# EAGLE board eeArm_Breakout_Panel (EAGLE 7.2.0)
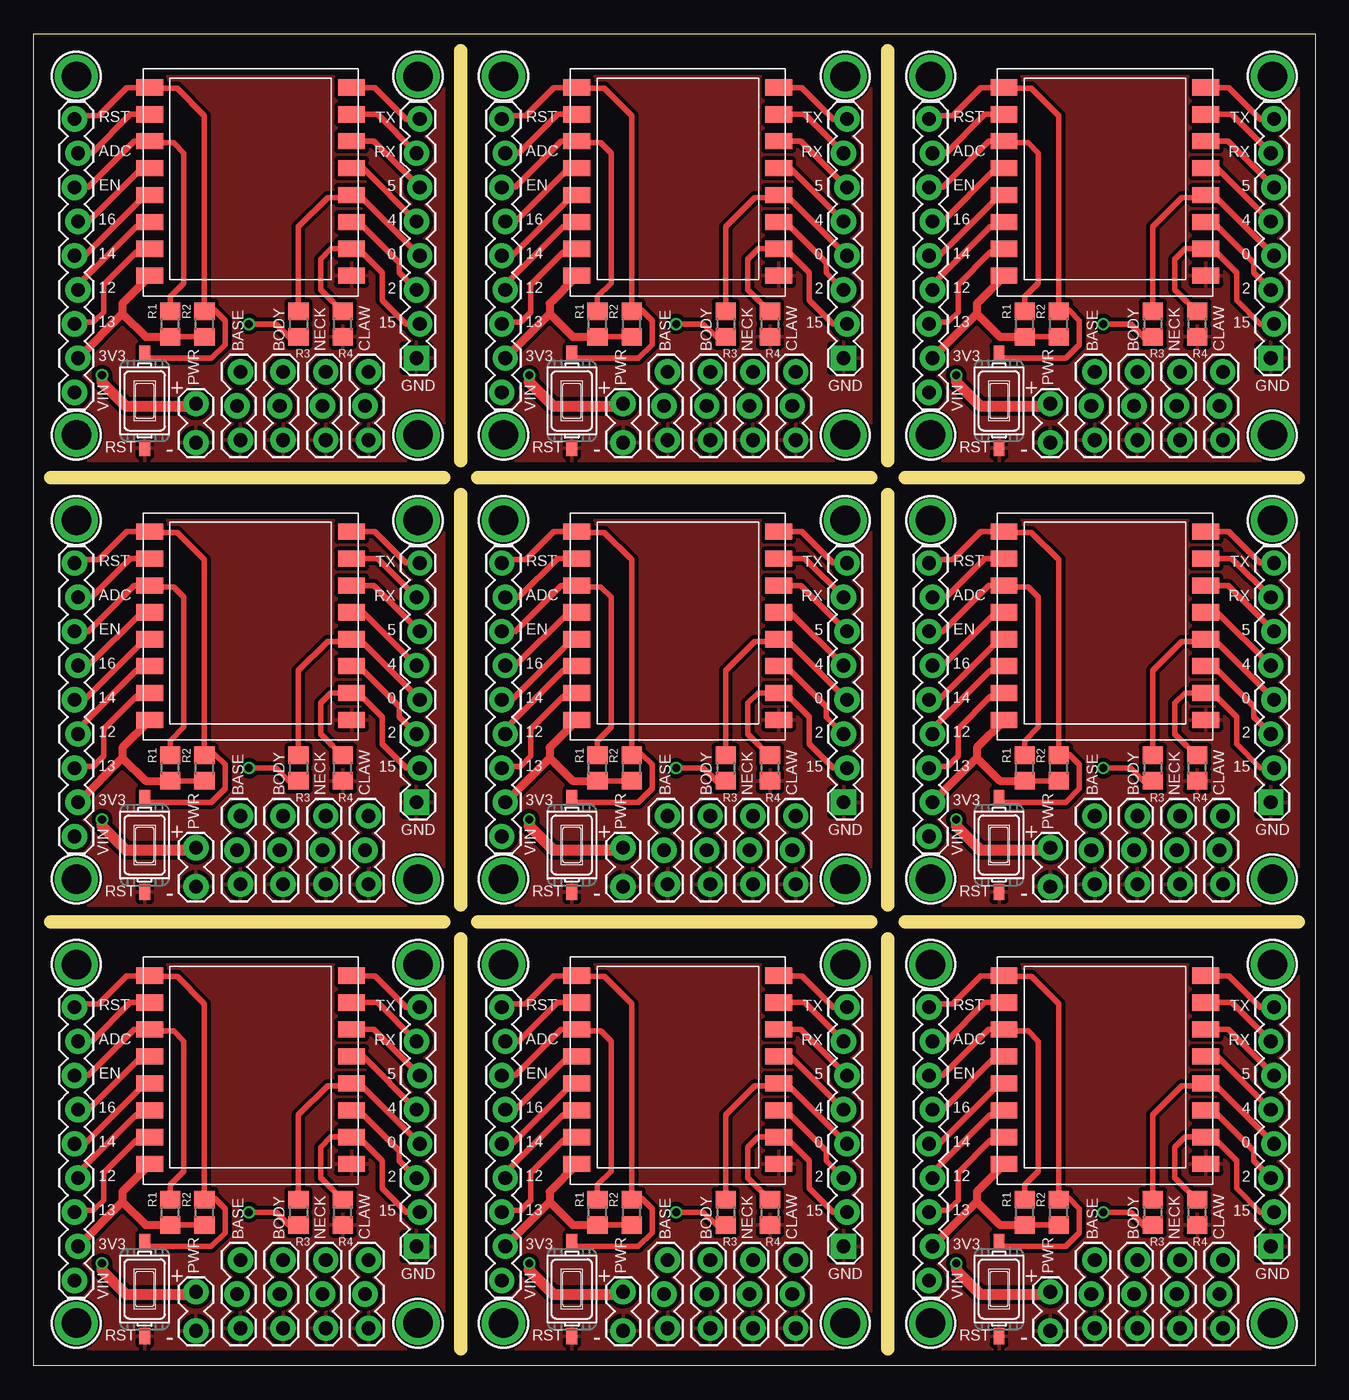
[diagram p0: board, top side]
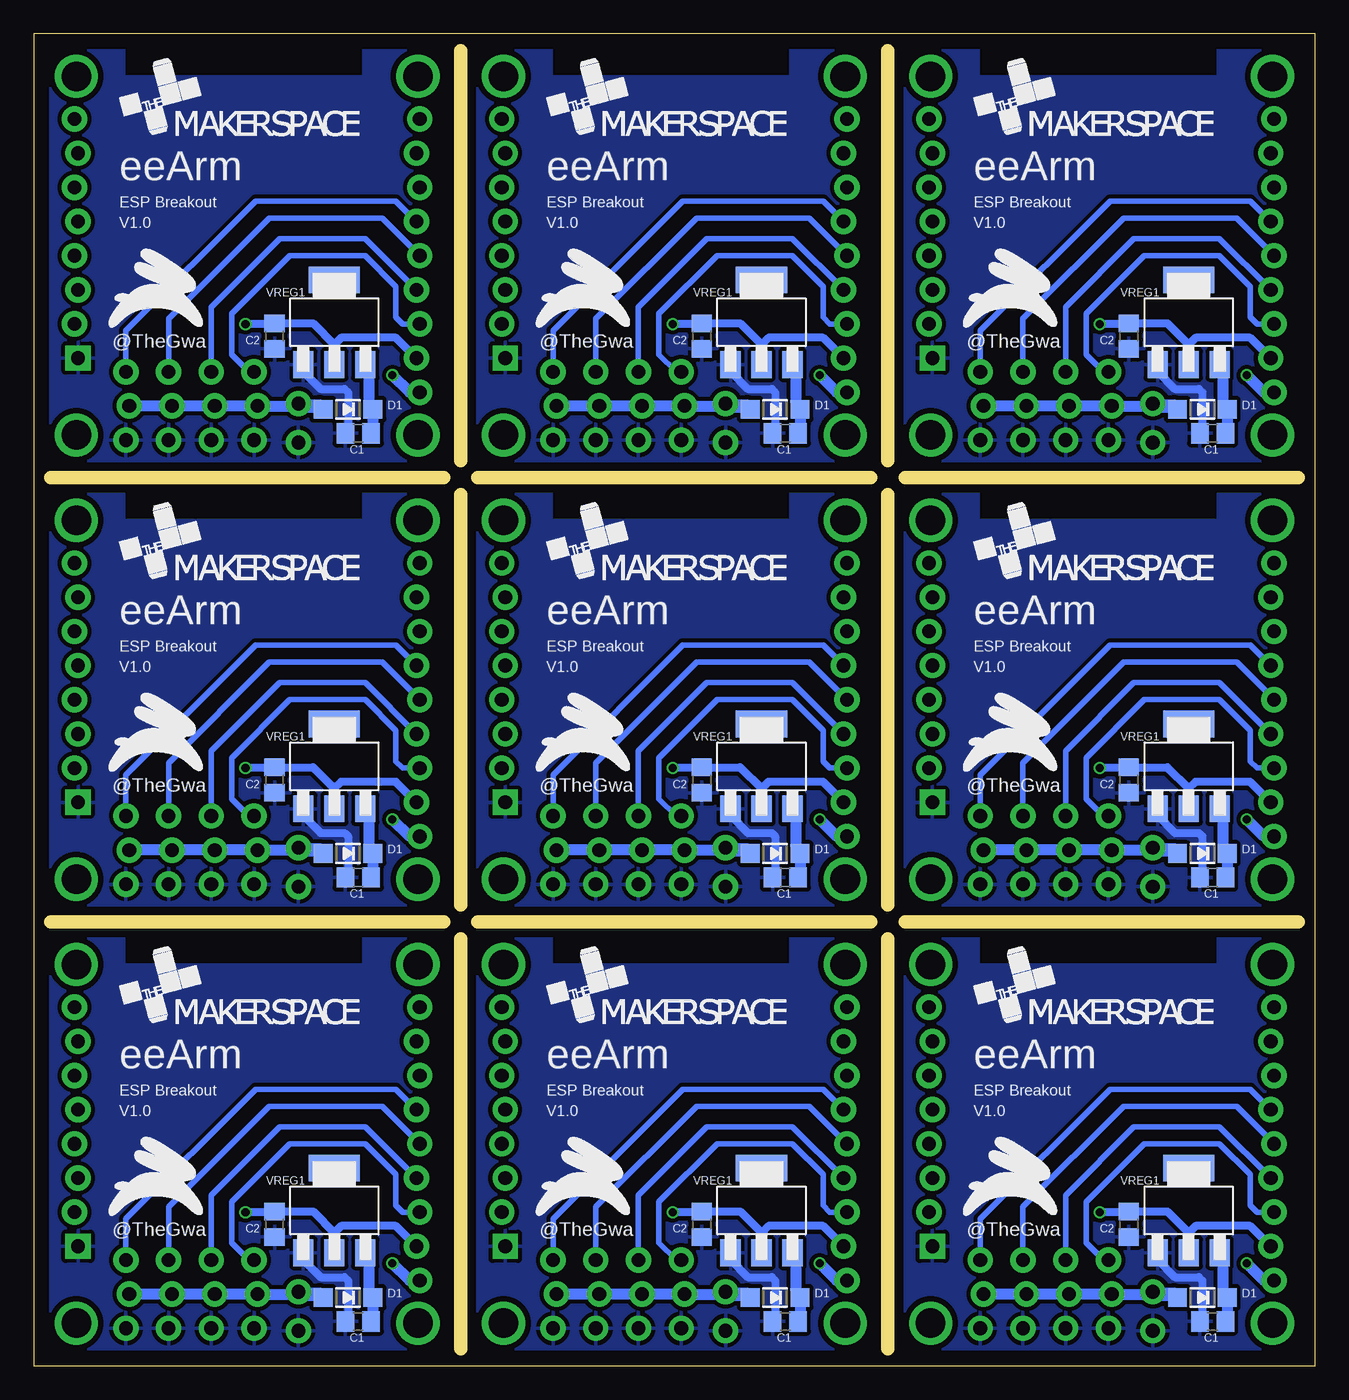
[diagram p1: board, bottom side, seen from below]

Size 95.25 x 99.06 mm. Coordinates in mm from the lower left corner, seen from the top.
Outline: 0,0 0,99.06 95.25,99.06 95.25,0 0,0
Copper layers (1*16): Top 0.035mm / dielectric 1.5mm / Bottom 0.035mm
Design rules "dirt_cheap_dirty_boards.v1 *": minimum track width 5mil, minimum drill 12mil, track to track 12mil, track to pad 12mil, pad to pad 12mil, via to via 12mil, smd to smd 0mil, copper to edge 10mil, drill to drill 10mil, minimum pad ring 10mil, minimum via ring 6mil, stop-mask expansion 2mil, vias tented up to drill 25mil, thermal gap 12mil
tRestrict: area 7.4,30 to 24.9,31.8; area 39.1,30 to 56.6,31.8; area 70.9,30 to 88.4,31.8; area 7.4,63 to 24.9,64.8; area 39.1,63 to 56.6,64.8; area 70.9,63 to 88.4,64.8; area 7.4,96 to 24.9,97.8; area 39.1,96 to 56.6,97.8; area 70.9,96 to 88.4,97.8
bRestrict: area 7.4,30 to 24.9,31.8; area 39.1,30 to 56.6,31.8; area 70.9,30 to 88.4,31.8; area 7.4,63 to 24.9,64.8; area 39.1,63 to 56.6,64.8; area 70.9,63 to 88.4,64.8; area 7.4,96 to 24.9,97.8; area 39.1,96 to 56.6,97.8; area 70.9,96 to 88.4,97.8
Milling: 12 lines

## Footprints (pad centres in the part's own frame; a part is rotated, then mirrored left to right if it is on the bottom)
1X03_LOCK = drill 1.016 pad 1.88: 1 0,0.127; 2 2.54,-0.127; 3 5.08,0.127
C0805 = smd 1.3 x 1.5: 1 -0.95,0; 2 0.95,0
SOD-123 = smd 1.4 x 1.4: A 1.85,0; C -1.85,0
1X08_LOCK = drill 1.016 pad 1.88 square: 1 0,0.127 | drill 1.016 pad 1.88: 2 2.54,-0.127; 3 5.08,0.127; 4 7.62,-0.127; 5 10.16,0.127; 6 12.7,-0.127; 7 15.24,0.127; 8 17.78,-0.127
1X09_LOCK = drill 1.016 pad 1.88: 1 0,0.127; 2 2.54,-0.127; 3 5.08,0.127; 4 7.62,-0.127; 5 10.16,0.127; 6 12.7,-0.127; 7 15.24,0.127; 8 17.78,-0.127; 9 20.32,0.127
1X02_LOCK = drill 1.016 pad 1.88: 1 -0.178,0; 2 2.718,0
R0805 = smd 1.3 x 1.5: 1 -0.95,0; 2 0.95,0
SW_TACT_3X6 = smd 1.2 x 0.8: 1 -3.5,0; 2 3.5,0
MOUNTINGHOLE_2.0_PLATED = drill 2.2 pad 3: P$1 0,0
SOT-223 = smd 1.5 x 2: 1 -2.3,-3.15; 2 0,-3.15; 3 2.3,-3.15 | smd 3.8 x 2: 4 0,3.15
ESP-12-NOPLACE = smd 2 x 1.2: 1 -7.5,4.5; 2 -7.5,2.5; 3 -7.5,0.5; 4 -7.5,-1.5; 5 -7.5,-3.5; 6 -7.5,-5.5; 7 -7.5,-7.5; 8 -7.5,-9.5; 9 7.5,-9.5; 10 7.5,-7.5; 11 7.5,-5.5; 12 7.5,-3.5; 13 7.5,-1.5; 14 7.5,0.5; 15 7.5,2.5; 16 7.5,4.5

## Placement (x,y rotation side)
BASE  [1X03_LOCK]  15.24,7.87 270 top
BASE1  [1X03_LOCK]  46.99,7.87 270 top
BASE2  [1X03_LOCK]  78.74,7.87 270 top
BASE3  [1X03_LOCK]  15.24,40.89 270 top
BASE4  [1X03_LOCK]  46.99,40.89 270 top
BASE5  [1X03_LOCK]  78.74,40.89 270 top
BASE6  [1X03_LOCK]  15.24,73.91 270 top
BASE7  [1X03_LOCK]  46.99,73.91 270 top
BASE8  [1X03_LOCK]  78.74,73.91 270 top
BODY  [1X03_LOCK]  18.42,7.87 270 top
BODY1  [1X03_LOCK]  50.16,7.87 270 top
BODY2  [1X03_LOCK]  81.92,7.87 270 top
BODY3  [1X03_LOCK]  18.42,40.89 270 top
BODY4  [1X03_LOCK]  50.16,40.89 270 top
BODY5  [1X03_LOCK]  81.92,40.89 270 top
BODY6  [1X03_LOCK]  18.42,73.91 270 top
BODY7  [1X03_LOCK]  50.16,73.91 270 top
BODY8  [1X03_LOCK]  81.92,73.91 270 top
C1  100n  [C0805]  7.62,3.3 180 bottom
C2  10u  [C0805]  13.84,10.54 270 bottom
C3  100n  [C0805]  39.37,3.3 180 bottom
C4  10u  [C0805]  45.59,10.54 270 bottom
C5  100n  [C0805]  71.12,3.3 180 bottom
C6  10u  [C0805]  77.34,10.54 270 bottom
C7  100n  [C0805]  7.62,36.32 180 bottom
C8  10u  [C0805]  13.84,43.56 270 bottom
C9  100n  [C0805]  39.37,36.32 180 bottom
C10  10u  [C0805]  45.59,43.56 270 bottom
C11  100n  [C0805]  71.12,36.32 180 bottom
C12  10u  [C0805]  77.34,43.56 270 bottom
C13  100n  [C0805]  7.62,69.34 180 bottom
C14  10u  [C0805]  13.84,76.58 270 bottom
C15  100n  [C0805]  39.37,69.34 180 bottom
C16  10u  [C0805]  45.59,76.58 270 bottom
C17  100n  [C0805]  71.12,69.34 180 bottom
C18  10u  [C0805]  77.34,76.58 270 bottom
CLAW  [1X03_LOCK]  24.77,7.87 270 top
CLAW1  [1X03_LOCK]  56.52,7.87 270 top
CLAW2  [1X03_LOCK]  88.27,7.87 270 top
CLAW3  [1X03_LOCK]  24.77,40.89 270 top
CLAW4  [1X03_LOCK]  56.52,40.89 270 top
CLAW5  [1X03_LOCK]  88.27,40.89 270 top
CLAW6  [1X03_LOCK]  24.77,73.91 270 top
CLAW7  [1X03_LOCK]  56.52,73.91 270 top
CLAW8  [1X03_LOCK]  88.27,73.91 270 top
D1  MBR120  [SOD-123]  8.38,5.08 180 bottom
D2  MBR120  [SOD-123]  40.13,5.08 180 bottom
D3  MBR120  [SOD-123]  71.88,5.08 180 bottom
D4  MBR120  [SOD-123]  8.38,38.1 180 bottom
D5  MBR120  [SOD-123]  40.13,38.1 180 bottom
D6  MBR120  [SOD-123]  71.88,38.1 180 bottom
D7  MBR120  [SOD-123]  8.38,71.12 180 bottom
D8  MBR120  [SOD-123]  40.13,71.12 180 bottom
D9  MBR120  [SOD-123]  71.88,71.12 180 bottom
E$1  [MAKERSPACE_LOGO]  25.4,25.4 0 bottom
E$2  [GWAJA-LOGO-PLACE]  26.16,11.18 0 bottom
E$3  [MAKERSPACE_LOGO]  57.15,25.4 0 bottom
E$4  [GWAJA-LOGO-PLACE]  57.91,11.18 0 bottom
E$5  [MAKERSPACE_LOGO]  88.9,25.4 0 bottom
E$6  [GWAJA-LOGO-PLACE]  89.66,11.18 0 bottom
E$7  [MAKERSPACE_LOGO]  25.4,58.42 0 bottom
E$8  [GWAJA-LOGO-PLACE]  26.16,44.2 0 bottom
E$9  [MAKERSPACE_LOGO]  57.15,58.42 0 bottom
E$10  [GWAJA-LOGO-PLACE]  57.91,44.2 0 bottom
E$11  [MAKERSPACE_LOGO]  88.9,58.42 0 bottom
E$12  [GWAJA-LOGO-PLACE]  89.66,44.2 0 bottom
E$13  [MAKERSPACE_LOGO]  25.4,91.44 0 bottom
E$14  [GWAJA-LOGO-PLACE]  26.16,77.22 0 bottom
E$15  [MAKERSPACE_LOGO]  57.15,91.44 0 bottom
E$16  [GWAJA-LOGO-PLACE]  57.91,77.22 0 bottom
E$17  [MAKERSPACE_LOGO]  88.9,91.44 0 bottom
E$18  [GWAJA-LOGO-PLACE]  89.66,77.22 0 bottom
JP1  J1  [1X08_LOCK]  60.32,8.89 90 top
JP2  J1  [1X08_LOCK]  28.58,8.89 90 top
JP3  [1X09_LOCK]  3.17,6.35 90 top
JP4  [1X09_LOCK]  34.92,6.35 90 top
JP5  J1  [1X08_LOCK]  92.08,8.89 90 top
JP6  [1X09_LOCK]  66.68,6.35 90 top
JP7  J1  [1X08_LOCK]  28.58,41.91 90 top
JP8  [1X09_LOCK]  3.17,39.37 90 top
JP9  J1  [1X08_LOCK]  60.32,41.91 90 top
JP10  [1X09_LOCK]  34.92,39.37 90 top
JP11  J1  [1X08_LOCK]  92.08,41.91 90 top
JP12  [1X09_LOCK]  66.68,39.37 90 top
JP13  J1  [1X08_LOCK]  28.58,74.93 90 top
JP14  [1X09_LOCK]  3.17,72.39 90 top
JP15  J1  [1X08_LOCK]  60.32,74.93 90 top
JP16  [1X09_LOCK]  34.92,72.39 90 top
JP17  J1  [1X08_LOCK]  92.08,74.93 90 top
JP18  [1X09_LOCK]  66.68,72.39 90 top
NECK  [1X03_LOCK]  21.59,7.87 270 top
NECK1  [1X03_LOCK]  53.34,7.87 270 top
NECK2  [1X03_LOCK]  85.09,7.87 270 top
NECK3  [1X03_LOCK]  21.59,40.89 270 top
NECK4  [1X03_LOCK]  53.34,40.89 270 top
NECK5  [1X03_LOCK]  85.09,40.89 270 top
NECK6  [1X03_LOCK]  21.59,73.91 270 top
NECK7  [1X03_LOCK]  53.34,73.91 270 top
NECK8  [1X03_LOCK]  85.09,73.91 270 top
POWER  [1X02_LOCK]  12.06,5.33 270 top
POWER1  [1X02_LOCK]  43.81,5.33 270 top
POWER2  [1X02_LOCK]  75.57,5.33 270 top
POWER3  [1X02_LOCK]  12.06,38.35 270 top
POWER4  [1X02_LOCK]  43.81,38.35 270 top
POWER5  [1X02_LOCK]  75.57,38.35 270 top
POWER6  [1X02_LOCK]  12.06,71.37 270 top
POWER7  [1X02_LOCK]  43.81,71.37 270 top
POWER8  [1X02_LOCK]  75.57,71.37 270 top
R1  4K7  [R0805]  10.16,11.43 90 top
R2  4K7  [R0805]  12.7,11.43 90 top
R3  4K7  [R0805]  19.69,11.43 270 top
R4  4K7  [R0805]  22.99,11.43 90 top
R5  4K7  [R0805]  54.74,11.43 90 top
R6  4K7  [R0805]  41.91,11.43 90 top
R7  4K7  [R0805]  44.45,11.43 90 top
R8  4K7  [R0805]  51.43,11.43 270 top
R9  4K7  [R0805]  86.49,11.43 90 top
R10  4K7  [R0805]  73.66,11.43 90 top
R11  4K7  [R0805]  76.2,11.43 90 top
R12  4K7  [R0805]  83.19,11.43 270 top
R13  4K7  [R0805]  22.99,44.45 90 top
R14  4K7  [R0805]  10.16,44.45 90 top
R15  4K7  [R0805]  12.7,44.45 90 top
R16  4K7  [R0805]  19.69,44.45 270 top
R17  4K7  [R0805]  54.74,44.45 90 top
R18  4K7  [R0805]  41.91,44.45 90 top
R19  4K7  [R0805]  44.45,44.45 90 top
R20  4K7  [R0805]  51.43,44.45 270 top
R21  4K7  [R0805]  86.49,44.45 90 top
R22  4K7  [R0805]  73.66,44.45 90 top
R23  4K7  [R0805]  76.2,44.45 90 top
R24  4K7  [R0805]  83.19,44.45 270 top
R25  4K7  [R0805]  22.99,77.47 90 top
R26  4K7  [R0805]  10.16,77.47 90 top
R27  4K7  [R0805]  12.7,77.47 90 top
R28  4K7  [R0805]  19.69,77.47 270 top
R29  4K7  [R0805]  54.74,77.47 90 top
R30  4K7  [R0805]  41.91,77.47 90 top
R31  4K7  [R0805]  44.45,77.47 90 top
R32  4K7  [R0805]  51.43,77.47 270 top
R33  4K7  [R0805]  86.49,77.47 90 top
R34  4K7  [R0805]  73.66,77.47 90 top
R35  4K7  [R0805]  76.2,77.47 90 top
R36  4K7  [R0805]  83.19,77.47 270 top
RESET  SW_TACT_2P-3X6  [SW_TACT_3X6]  8.26,5.71 90 top
RESET1  SW_TACT_2P-3X6  [SW_TACT_3X6]  40,5.71 90 top
RESET2  SW_TACT_2P-3X6  [SW_TACT_3X6]  71.76,5.71 90 top
RESET3  SW_TACT_2P-3X6  [SW_TACT_3X6]  8.26,38.73 90 top
RESET4  SW_TACT_2P-3X6  [SW_TACT_3X6]  40,38.73 90 top
RESET5  SW_TACT_2P-3X6  [SW_TACT_3X6]  71.76,38.73 90 top
RESET6  SW_TACT_2P-3X6  [SW_TACT_3X6]  8.26,71.76 90 top
RESET7  SW_TACT_2P-3X6  [SW_TACT_3X6]  40,71.76 90 top
RESET8  SW_TACT_2P-3X6  [SW_TACT_3X6]  71.76,71.76 90 top
U$1  MOUNTINGHOLE2.0  [MOUNTINGHOLE_2.0_PLATED]  60.32,29.85 0 top
U$2  MOUNTINGHOLE2.0  [MOUNTINGHOLE_2.0_PLATED]  34.92,29.85 0 top
U$3  MOUNTINGHOLE2.0  [MOUNTINGHOLE_2.0_PLATED]  34.92,3.17 0 top
U$4  MOUNTINGHOLE2.0  [MOUNTINGHOLE_2.0_PLATED]  60.32,3.17 0 top
U$5  MOUNTINGHOLE2.0  [MOUNTINGHOLE_2.0_PLATED]  92.08,29.85 0 top
U$6  MOUNTINGHOLE2.0  [MOUNTINGHOLE_2.0_PLATED]  28.58,29.85 0 top
U$7  MOUNTINGHOLE2.0  [MOUNTINGHOLE_2.0_PLATED]  3.17,29.85 0 top
U$8  MOUNTINGHOLE2.0  [MOUNTINGHOLE_2.0_PLATED]  3.17,3.17 0 top
U$9  MOUNTINGHOLE2.0  [MOUNTINGHOLE_2.0_PLATED]  28.58,3.17 0 top
U$10  MOUNTINGHOLE2.0  [MOUNTINGHOLE_2.0_PLATED]  66.68,29.85 0 top
U$11  MOUNTINGHOLE2.0  [MOUNTINGHOLE_2.0_PLATED]  66.68,3.17 0 top
U$12  MOUNTINGHOLE2.0  [MOUNTINGHOLE_2.0_PLATED]  92.08,3.17 0 top
U$13  MOUNTINGHOLE2.0  [MOUNTINGHOLE_2.0_PLATED]  28.58,62.86 0 top
U$14  MOUNTINGHOLE2.0  [MOUNTINGHOLE_2.0_PLATED]  3.17,62.86 0 top
U$15  MOUNTINGHOLE2.0  [MOUNTINGHOLE_2.0_PLATED]  3.17,36.2 0 top
U$16  MOUNTINGHOLE2.0  [MOUNTINGHOLE_2.0_PLATED]  28.58,36.2 0 top
U$17  MOUNTINGHOLE2.0  [MOUNTINGHOLE_2.0_PLATED]  60.32,62.86 0 top
U$18  MOUNTINGHOLE2.0  [MOUNTINGHOLE_2.0_PLATED]  34.92,62.86 0 top
U$19  MOUNTINGHOLE2.0  [MOUNTINGHOLE_2.0_PLATED]  34.92,36.2 0 top
U$20  MOUNTINGHOLE2.0  [MOUNTINGHOLE_2.0_PLATED]  60.32,36.2 0 top
U$21  MOUNTINGHOLE2.0  [MOUNTINGHOLE_2.0_PLATED]  92.08,62.86 0 top
U$22  MOUNTINGHOLE2.0  [MOUNTINGHOLE_2.0_PLATED]  66.68,62.86 0 top
U$23  MOUNTINGHOLE2.0  [MOUNTINGHOLE_2.0_PLATED]  66.68,36.2 0 top
U$24  MOUNTINGHOLE2.0  [MOUNTINGHOLE_2.0_PLATED]  92.08,36.2 0 top
U$25  MOUNTINGHOLE2.0  [MOUNTINGHOLE_2.0_PLATED]  28.58,95.89 0 top
U$26  MOUNTINGHOLE2.0  [MOUNTINGHOLE_2.0_PLATED]  3.17,95.89 0 top
U$27  MOUNTINGHOLE2.0  [MOUNTINGHOLE_2.0_PLATED]  3.17,69.22 0 top
U$28  MOUNTINGHOLE2.0  [MOUNTINGHOLE_2.0_PLATED]  28.58,69.22 0 top
U$29  MOUNTINGHOLE2.0  [MOUNTINGHOLE_2.0_PLATED]  60.32,95.89 0 top
U$30  MOUNTINGHOLE2.0  [MOUNTINGHOLE_2.0_PLATED]  34.92,95.89 0 top
U$31  MOUNTINGHOLE2.0  [MOUNTINGHOLE_2.0_PLATED]  34.92,69.22 0 top
U$32  MOUNTINGHOLE2.0  [MOUNTINGHOLE_2.0_PLATED]  60.32,69.22 0 top
U$33  MOUNTINGHOLE2.0  [MOUNTINGHOLE_2.0_PLATED]  92.08,95.89 0 top
U$34  MOUNTINGHOLE2.0  [MOUNTINGHOLE_2.0_PLATED]  66.68,95.89 0 top
U$35  MOUNTINGHOLE2.0  [MOUNTINGHOLE_2.0_PLATED]  66.68,69.22 0 top
U$36  MOUNTINGHOLE2.0  [MOUNTINGHOLE_2.0_PLATED]  92.08,69.22 0 top
VREG1  LD1117  [SOT-223]  9.4,11.56 0 bottom
VREG2  LD1117  [SOT-223]  41.15,11.56 0 bottom
VREG3  LD1117  [SOT-223]  72.9,11.56 0 bottom
VREG4  LD1117  [SOT-223]  9.4,44.58 0 bottom
VREG5  LD1117  [SOT-223]  41.15,44.58 0 bottom
VREG6  LD1117  [SOT-223]  72.9,44.58 0 bottom
VREG7  LD1117  [SOT-223]  9.4,77.6 0 bottom
VREG8  LD1117  [SOT-223]  41.15,77.6 0 bottom
VREG9  LD1117  [SOT-223]  72.9,77.6 0 bottom
X1  ESP8266  [ESP-12-NOPLACE]  16.13,24.51 0 top
X2  ESP8266  [ESP-12-NOPLACE]  47.88,24.51 0 top
X3  ESP8266  [ESP-12-NOPLACE]  79.63,24.51 0 top
X4  ESP8266  [ESP-12-NOPLACE]  16.13,57.53 0 top
X5  ESP8266  [ESP-12-NOPLACE]  47.88,57.53 0 top
X6  ESP8266  [ESP-12-NOPLACE]  79.63,57.53 0 top
X7  ESP8266  [ESP-12-NOPLACE]  16.13,90.55 0 top
X8  ESP8266  [ESP-12-NOPLACE]  47.88,90.55 0 top
X9  ESP8266  [ESP-12-NOPLACE]  79.63,90.55 0 top

## Library data of the parts
BASE BASE1-BASE8 BODY BODY1-BODY8 CLAW CLAW1-CLAW8 JP1-JP18 NECK NECK1-NECK8 POWER POWER1-POWER8 = SparkFun-Connectors
C1-C18 R1-R36 = resistor
D1-D9 = microbuilder
E$1 E$3 E$5 E$7 E$9 E$11 E$13 E$15 E$17 RESET RESET1-RESET8 X1-X9 = Gwa's Parts
E$2 E$4 E$6 E$8 E$10 E$12 E$14 E$16 E$18 = Gwaja-logo
U$1-U$36 = microbuilder; BOM: EXCLUDE
VREG1-VREG9 = dp_devices

## Nets
+3V1: C4.1 JP4.2 R6.1 R7.1 R8.2 VREG2.2 X2.8
+3V2: C6.1 JP6.2 R10.1 R11.1 R12.2 VREG3.2 X3.8
+3V3: C2.1 JP3.2 R1.1 R2.1 R3.2 VREG1.2 X1.8
+3V4: C8.1 JP8.2 R14.1 R15.1 R16.2 VREG4.2 X4.8
+3V5: C10.1 JP10.2 R18.1 R19.1 R20.2 VREG5.2 X5.8
+3V6: C12.1 JP12.2 R22.1 R23.1 R24.2 VREG6.2 X6.8
+3V7: C14.1 JP14.2 R26.1 R27.1 R28.2 VREG7.2 X7.8
+3V8: C16.1 JP16.2 R30.1 R31.1 R32.2 VREG8.2 X8.8
+3V9: C18.1 JP18.2 R34.1 R35.1 R36.2 VREG9.2 X9.8
ADC: JP3.8 X1.2
ADC1: JP4.8 X2.2
ADC2: JP6.8 X3.2
ADC3: JP8.8 X4.2
ADC4: JP10.8 X5.2
ADC5: JP12.8 X6.2
ADC6: JP14.8 X7.2
ADC7: JP16.8 X8.2
ADC8: JP18.8 X9.2
BASE: BASE.1 JP3.3 X1.7
BASE1: BASE1.1 JP4.3 X2.7
BASE2: BASE2.1 JP6.3 X3.7
BASE3: BASE3.1 JP8.3 X4.7
BASE4: BASE4.1 JP10.3 X5.7
BASE5: BASE5.1 JP12.3 X6.7
BASE6: BASE6.1 JP14.3 X7.7
BASE7: BASE7.1 JP16.3 X8.7
BASE8: BASE8.1 JP18.3 X9.7
BODY: BODY.1 JP3.4 X1.6
BODY1: BODY1.1 JP4.4 X2.6
BODY2: BODY2.1 JP6.4 X3.6
BODY3: BODY3.1 JP8.4 X4.6
BODY4: BODY4.1 JP10.4 X5.6
BODY5: BODY5.1 JP12.4 X6.6
BODY6: BODY6.1 JP14.4 X7.6
BODY7: BODY7.1 JP16.4 X8.6
BODY8: BODY8.1 JP18.4 X9.6
CH_PD: JP3.7 R1.2 X1.3
CH_PD1: JP4.7 R6.2 X2.3
CH_PD2: JP6.7 R10.2 X3.3
CH_PD3: JP8.7 R14.2 X4.3
CH_PD4: JP10.7 R18.2 X5.3
CH_PD5: JP12.7 R22.2 X6.3
CH_PD6: JP14.7 R26.2 X7.3
CH_PD7: JP16.7 R30.2 X8.3
CH_PD8: JP18.7 R34.2 X9.3
CLAW: CLAW.1 JP3.6 X1.4
CLAW1: CLAW1.1 JP4.6 X2.4
CLAW2: CLAW2.1 JP6.6 X3.4
CLAW3: CLAW3.1 JP8.6 X4.4
CLAW4: CLAW4.1 JP10.6 X5.4
CLAW5: CLAW5.1 JP12.6 X6.4
CLAW6: CLAW6.1 JP14.6 X7.4
CLAW7: CLAW7.1 JP16.6 X8.4
CLAW8: CLAW8.1 JP18.6 X9.4
DTR: JP2.4 R3.1 X1.12
DTR1: JP1.4 R8.1 X2.12
DTR2: JP5.4 R12.1 X3.12
DTR3: JP7.4 R16.1 X4.12
DTR4: JP9.4 R20.1 X5.12
DTR5: JP11.4 R24.1 X6.12
DTR6: JP13.4 R28.1 X7.12
DTR7: JP15.4 R32.1 X8.12
DTR8: JP17.4 R36.1 X9.12
GND: BASE.3 BODY.3 C1.2 C2.2 CLAW.3 JP2.1 NECK.3 POWER.2 R4.1 RESET.1 VREG1.1 X1.9
GND1: BASE1.3 BODY1.3 C3.2 C4.2 CLAW1.3 JP1.1 NECK1.3 POWER1.2 R5.1 RESET1.1 VREG2.1 X2.9
GND2: BASE2.3 BODY2.3 C5.2 C6.2 CLAW2.3 JP5.1 NECK2.3 POWER2.2 R9.1 RESET2.1 VREG3.1 X3.9
GND3: BASE3.3 BODY3.3 C7.2 C8.2 CLAW3.3 JP7.1 NECK3.3 POWER3.2 R13.1 RESET3.1 VREG4.1 X4.9
GND4: BASE4.3 BODY4.3 C9.2 C10.2 CLAW4.3 JP9.1 NECK4.3 POWER4.2 R17.1 RESET4.1 VREG5.1 X5.9
GND5: BASE5.3 BODY5.3 C11.2 C12.2 CLAW5.3 JP11.1 NECK5.3 POWER5.2 R21.1 RESET5.1 VREG6.1 X6.9
GND6: BASE6.3 BODY6.3 C13.2 C14.2 CLAW6.3 JP13.1 NECK6.3 POWER6.2 R25.1 RESET6.1 VREG7.1 X7.9
GND7: BASE7.3 BODY7.3 C15.2 C16.2 CLAW7.3 JP15.1 NECK7.3 POWER7.2 R29.1 RESET7.1 VREG8.1 X8.9
GND8: BASE8.3 BODY8.3 C17.2 C18.2 CLAW8.3 JP17.1 NECK8.3 POWER8.2 R33.1 RESET8.1 VREG9.1 X9.9
GPIO1: JP1.5 X2.13
GPIO2: JP2.3 X1.11
GPIO3: JP1.3 X2.11
GPIO4: JP2.6 X1.14
GPIO5: JP2.5 X1.13
GPIO6: JP1.6 X2.14
GPIO7: JP1.2 R5.2 X2.10
GPIO8: JP5.5 X3.13
GPIO9: JP5.3 X3.11
GPIO10: JP5.6 X3.14
GPIO11: JP5.2 R9.2 X3.10
GPIO12: JP7.5 X4.13
GPIO13: JP7.3 X4.11
GPIO14: JP7.6 X4.14
GPIO15: JP2.2 R4.2 X1.10
GPIO16: JP7.2 R13.2 X4.10
GPIO17: JP9.5 X5.13
GPIO18: JP9.3 X5.11
GPIO19: JP9.6 X5.14
GPIO20: JP9.2 R17.2 X5.10
GPIO21: JP11.5 X6.13
GPIO22: JP11.3 X6.11
GPIO23: JP11.6 X6.14
GPIO24: JP11.2 R21.2 X6.10
GPIO25: JP13.5 X7.13
GPIO26: JP13.3 X7.11
GPIO27: JP13.6 X7.14
GPIO28: JP13.2 R25.2 X7.10
GPIO29: JP15.5 X8.13
GPIO30: JP15.3 X8.11
GPIO31: JP15.6 X8.14
GPIO32: JP15.2 R29.2 X8.10
GPIO33: JP17.5 X9.13
GPIO34: JP17.3 X9.11
GPIO35: JP17.6 X9.14
GPIO36: JP17.2 R33.2 X9.10
NECK: JP3.5 NECK.1 X1.5
NECK1: JP4.5 NECK1.1 X2.5
NECK2: JP6.5 NECK2.1 X3.5
NECK3: JP8.5 NECK3.1 X4.5
NECK4: JP10.5 NECK4.1 X5.5
NECK5: JP12.5 NECK5.1 X6.5
NECK6: JP14.5 NECK6.1 X7.5
NECK7: JP16.5 NECK7.1 X8.5
NECK8: JP18.5 NECK8.1 X9.5
RESET: JP3.9 R2.2 RESET.2 X1.1
RESET1: JP4.9 R7.2 RESET1.2 X2.1
RESET2: JP6.9 R11.2 RESET2.2 X3.1
RESET3: JP8.9 R15.2 RESET3.2 X4.1
RESET4: JP10.9 R19.2 RESET4.2 X5.1
RESET5: JP12.9 R23.2 RESET5.2 X6.1
RESET6: JP14.9 R27.2 RESET6.2 X7.1
RESET7: JP16.9 R31.2 RESET7.2 X8.1
RESET8: JP18.9 R35.2 RESET8.2 X9.1
RX: JP2.7 X1.15
RX1: JP1.7 X2.15
RX2: JP5.7 X3.15
RX3: JP7.7 X4.15
RX4: JP9.7 X5.15
RX5: JP11.7 X6.15
RX6: JP13.7 X7.15
RX7: JP15.7 X8.15
RX8: JP17.7 X9.15
TX: JP2.8 X1.16
TX1: JP1.8 X2.16
TX2: JP5.8 X3.16
TX3: JP7.8 X4.16
TX4: JP9.8 X5.16
TX5: JP11.8 X6.16
TX6: JP13.8 X7.16
TX7: JP15.8 X8.16
TX8: JP17.8 X9.16
VBATT: BASE.2 BODY.2 CLAW.2 D1.A JP3.1 NECK.2 POWER.1
VBATT1: BASE1.2 BODY1.2 CLAW1.2 D2.A JP4.1 NECK1.2 POWER1.1
VBATT2: BASE2.2 BODY2.2 CLAW2.2 D3.A JP6.1 NECK2.2 POWER2.1
VBATT3: BASE3.2 BODY3.2 CLAW3.2 D4.A JP8.1 NECK3.2 POWER3.1
VBATT4: BASE4.2 BODY4.2 CLAW4.2 D5.A JP10.1 NECK4.2 POWER4.1
VBATT5: BASE5.2 BODY5.2 CLAW5.2 D6.A JP12.1 NECK5.2 POWER5.1
VBATT6: BASE6.2 BODY6.2 CLAW6.2 D7.A JP14.1 NECK6.2 POWER6.1
VBATT7: BASE7.2 BODY7.2 CLAW7.2 D8.A JP16.1 NECK7.2 POWER7.1
VBATT8: BASE8.2 BODY8.2 CLAW8.2 D9.A JP18.1 NECK8.2 POWER8.1
VIN: C1.1 D1.C VREG1.3
VIN1: C3.1 D2.C VREG2.3
VIN2: C5.1 D3.C VREG3.3
VIN3: C7.1 D4.C VREG4.3
VIN4: C9.1 D5.C VREG5.3
VIN5: C11.1 D6.C VREG6.3
VIN6: C13.1 D7.C VREG7.3
VIN7: C15.1 D8.C VREG8.3
VIN8: C17.1 D9.C VREG9.3

## Tracks (layer width: path | path; a pad name or v marks a point on that pad's centre or on a via)
+3V1  (via drill 0.6)
  Top 0.406: 41.84,10.41 R6.1 R7.1 | X2.8 40.38,14.98 | v47.75,11.43 49.78,11.43 50.8,10.41 51.37,10.41 R8.2
  Top 0.61: 40.38,14.98 38.35,12.95 38.35,12.19 | 38.35,12.19 JP4.2 | 38.35,12.19 40.07,10.48 R6.1
  Bottom 0.406: C4.1 45.66,11.49 45.72,11.43
  Bottom 0.61: C4.1 42.73,11.49 41.15,9.91 | 41.15,9.91 VREG2.2 | JP4.2 36.58,10.41 40.64,10.41 41.15,9.91 | 45.72,11.43 v47.75,11.43
+3V2  (via drill 0.6)
  Top 0.406: 73.59,10.41 R10.1 R11.1 | X3.8 72.13,14.98 | v79.5,11.43 81.53,11.43 82.55,10.41 83.12,10.41 R12.2
  Top 0.61: 72.13,14.98 70.1,12.95 70.1,12.19 | 70.1,12.19 JP6.2 | 70.1,12.19 71.82,10.48 R10.1
  Bottom 0.406: C6.1 77.41,11.49 77.47,11.43
  Bottom 0.61: C6.1 74.48,11.49 72.9,9.91 | 72.9,9.91 VREG3.2 | JP6.2 68.33,10.41 72.39,10.41 72.9,9.91 | 77.47,11.43 v79.5,11.43
+3V3  (via drill 0.6)
  Top 0.406: 10.09,10.41 R1.1 R2.1 | X1.8 8.63,14.98 | v16,11.43 18.03,11.43 19.05,10.41 19.62,10.41 R3.2
  Top 0.61: 8.63,14.98 6.6,12.95 6.6,12.19 | 6.6,12.19 JP3.2 | 6.6,12.19 8.32,10.48 R1.1
  Bottom 0.406: C2.1 13.91,11.49 13.97,11.43
  Bottom 0.61: C2.1 10.98,11.49 9.4,9.91 | 9.4,9.91 VREG1.2 | JP3.2 4.83,10.41 8.89,10.41 9.4,9.91 | 13.97,11.43 v16,11.43
+3V4  (via drill 0.6)
  Top 0.406: 10.09,43.43 R14.1 R15.1 | X4.8 8.63,48 | v16,44.45 18.03,44.45 19.05,43.43 19.62,43.43 R16.2
  Top 0.61: 8.63,48 6.6,45.97 6.6,45.21 | 6.6,45.21 JP8.2 | 6.6,45.21 8.32,43.5 R14.1
  Bottom 0.406: C8.1 13.91,44.51 13.97,44.45
  Bottom 0.61: C8.1 10.98,44.51 9.4,42.93 | 9.4,42.93 VREG4.2 | JP8.2 4.83,43.43 8.89,43.43 9.4,42.93 | 13.97,44.45 v16,44.45
+3V5  (via drill 0.6)
  Top 0.406: 41.84,43.43 R18.1 R19.1 | X5.8 40.38,48 | v47.75,44.45 49.78,44.45 50.8,43.43 51.37,43.43 R20.2
  Top 0.61: 40.38,48 38.35,45.97 38.35,45.21 | 38.35,45.21 JP10.2 | 38.35,45.21 40.07,43.5 R18.1
  Bottom 0.406: C10.1 45.66,44.51 45.72,44.45
  Bottom 0.61: C10.1 42.73,44.51 41.15,42.93 | 41.15,42.93 VREG5.2 | JP10.2 36.58,43.43 40.64,43.43 41.15,42.93 | 45.72,44.45 v47.75,44.45
+3V6  (via drill 0.6)
  Top 0.406: 73.59,43.43 R22.1 R23.1 | X6.8 72.13,48 | v79.5,44.45 81.53,44.45 82.55,43.43 83.12,43.43 R24.2
  Top 0.61: 72.13,48 70.1,45.97 70.1,45.21 | 70.1,45.21 JP12.2 | 70.1,45.21 71.82,43.5 R22.1
  Bottom 0.406: C12.1 77.41,44.51 77.47,44.45
  Bottom 0.61: C12.1 74.48,44.51 72.9,42.93 | 72.9,42.93 VREG6.2 | JP12.2 68.33,43.43 72.39,43.43 72.9,42.93 | 77.47,44.45 v79.5,44.45
+3V7  (via drill 0.6)
  Top 0.406: 10.09,76.45 R26.1 R27.1 | X7.8 8.63,81.02 | v16,77.47 18.03,77.47 19.05,76.45 19.62,76.45 R28.2
  Top 0.61: 8.63,81.02 6.6,78.99 6.6,78.23 | 6.6,78.23 JP14.2 | 6.6,78.23 8.32,76.52 R26.1
  Bottom 0.406: C14.1 13.91,77.53 13.97,77.47
  Bottom 0.61: C14.1 10.98,77.53 9.4,75.95 | 9.4,75.95 VREG7.2 | JP14.2 4.83,76.45 8.89,76.45 9.4,75.95 | 13.97,77.47 v16,77.47
+3V8  (via drill 0.6)
  Top 0.406: 41.84,76.45 R30.1 R31.1 | X8.8 40.38,81.02 | v47.75,77.47 49.78,77.47 50.8,76.45 51.37,76.45 R32.2
  Top 0.61: 40.38,81.02 38.35,78.99 38.35,78.23 | 38.35,78.23 JP16.2 | 38.35,78.23 40.07,76.52 R30.1
  Bottom 0.406: C16.1 45.66,77.53 45.72,77.47
  Bottom 0.61: C16.1 42.73,77.53 41.15,75.95 | 41.15,75.95 VREG8.2 | JP16.2 36.58,76.45 40.64,76.45 41.15,75.95 | 45.72,77.47 v47.75,77.47
+3V9  (via drill 0.6)
  Top 0.406: 73.59,76.45 R34.1 R35.1 | X9.8 72.13,81.02 | v79.5,77.47 81.53,77.47 82.55,76.45 83.12,76.45 R36.2
  Top 0.61: 72.13,81.02 70.1,78.99 70.1,78.23 | 70.1,78.23 JP18.2 | 70.1,78.23 71.82,76.52 R34.1
  Bottom 0.406: C18.1 77.41,77.53 77.47,77.47
  Bottom 0.61: C18.1 74.48,77.53 72.9,75.95 | 72.9,75.95 VREG9.2 | JP18.2 68.33,76.45 72.39,76.45 72.9,75.95 | 77.47,77.47 v79.5,77.47
ADC
  Top 0.406: X1.2 7.2,27.01 4.32,24.13 JP3.8
ADC1
  Top 0.406: X2.2 38.95,27.01 36.07,24.13 JP4.8
ADC2
  Top 0.406: X3.2 70.7,27.01 67.82,24.13 JP6.8
ADC3
  Top 0.406: X4.2 7.2,60.03 4.32,57.15 JP8.8
ADC4
  Top 0.406: X5.2 38.95,60.03 36.07,57.15 JP10.8
ADC5
  Top 0.406: X6.2 70.7,60.03 67.82,57.15 JP12.8
ADC6
  Top 0.406: X7.2 7.2,93.05 4.32,90.17 JP14.8
ADC7
  Top 0.406: X8.2 38.95,93.05 36.07,90.17 JP16.8
ADC8
  Top 0.406: X9.2 70.7,93.05 67.82,90.17 JP18.8
BASE
  Top 0.406: X1.7 8.38,17.01 | 8.38,17.01 8.38,17.02 | JP3.3 3.17,11.56 4.45,11.56 5.21,12.32 5.21,14.35 7.62,16.76 8.13,16.76 8.38,17.01
  Bottom 0.406: JP3.3 4.32,11.43 4.83,11.94 4.83,14.22 7.11,16.51 12.7,16.51 17.02,12.19 17.02,9.14 15.75,7.87 BASE.1
BASE1
  Top 0.406: X2.7 40.12,17.01 | 40.12,17.01 40.13,17.02 | JP4.3 34.92,11.56 36.2,11.56 36.96,12.32 36.96,14.35 39.37,16.76 39.88,16.76 40.12,17.01
  Bottom 0.406: JP4.3 36.07,11.43 36.58,11.94 36.58,14.22 38.86,16.51 44.45,16.51 48.77,12.19 48.77,9.14 47.5,7.87 BASE1.1
BASE2
  Top 0.406: X3.7 71.88,17.01 | 71.88,17.01 71.88,17.02 | JP6.3 66.68,11.56 67.95,11.56 68.71,12.32 68.71,14.35 71.12,16.76 71.63,16.76 71.88,17.01
  Bottom 0.406: JP6.3 67.82,11.43 68.33,11.94 68.33,14.22 70.61,16.51 76.2,16.51 80.52,12.19 80.52,9.14 79.25,7.87 BASE2.1
BASE3
  Top 0.406: X4.7 8.38,50.03 | 8.38,50.03 8.38,50.04 | JP8.3 3.17,44.58 4.45,44.58 5.21,45.34 5.21,47.37 7.62,49.78 8.13,49.78 8.38,50.03
  Bottom 0.406: JP8.3 4.32,44.45 4.83,44.96 4.83,47.24 7.11,49.53 12.7,49.53 17.02,45.21 17.02,42.16 15.75,40.89 BASE3.1
BASE4
  Top 0.406: X5.7 40.12,50.03 | 40.12,50.03 40.13,50.04 | JP10.3 34.92,44.58 36.2,44.58 36.96,45.34 36.96,47.37 39.37,49.78 39.88,49.78 40.12,50.03
  Bottom 0.406: JP10.3 36.07,44.45 36.58,44.96 36.58,47.24 38.86,49.53 44.45,49.53 48.77,45.21 48.77,42.16 47.5,40.89 BASE4.1
BASE5
  Top 0.406: X6.7 71.88,50.03 | 71.88,50.03 71.88,50.04 | JP12.3 66.68,44.58 67.95,44.58 68.71,45.34 68.71,47.37 71.12,49.78 71.63,49.78 71.88,50.03
  Bottom 0.406: JP12.3 67.82,44.45 68.33,44.96 68.33,47.24 70.61,49.53 76.2,49.53 80.52,45.21 80.52,42.16 79.25,40.89 BASE5.1
BASE6
  Top 0.406: X7.7 8.38,83.05 | 8.38,83.05 8.38,83.06 | JP14.3 3.17,77.6 4.45,77.6 5.21,78.36 5.21,80.39 7.62,82.8 8.13,82.8 8.38,83.05
  Bottom 0.406: JP14.3 4.32,77.47 4.83,77.98 4.83,80.26 7.11,82.55 12.7,82.55 17.02,78.23 17.02,75.18 15.75,73.91 BASE6.1
BASE7
  Top 0.406: X8.7 40.12,83.05 | 40.12,83.05 40.13,83.06 | JP16.3 34.92,77.6 36.2,77.6 36.96,78.36 36.96,80.39 39.37,82.8 39.88,82.8 40.12,83.05
  Bottom 0.406: JP16.3 36.07,77.47 36.58,77.98 36.58,80.26 38.86,82.55 44.45,82.55 48.77,78.23 48.77,75.18 47.5,73.91 BASE7.1
BASE8
  Top 0.406: X9.7 71.88,83.05 | 71.88,83.05 71.88,83.06 | JP18.3 66.68,77.6 67.95,77.6 68.71,78.36 68.71,80.39 71.12,82.8 71.63,82.8 71.88,83.05
  Bottom 0.406: JP18.3 67.82,77.47 68.33,77.98 68.33,80.26 70.61,82.55 76.2,82.55 80.52,78.23 80.52,75.18 79.25,73.91 BASE8.1
BODY
  Top 0.406: X1.6 8.34,19.01 8,18.67 7.62,18.67 3.3,14.35 JP3.4
  Bottom 0.406: JP3.4 7.11,17.78 13.46,17.78 18.54,12.7 BODY.1
BODY1
  Top 0.406: X2.6 40.09,19.01 39.75,18.67 39.37,18.67 35.05,14.35 JP4.4
  Bottom 0.406: JP4.4 38.86,17.78 45.21,17.78 50.29,12.7 BODY1.1
BODY2
  Top 0.406: X3.6 71.84,19.01 71.5,18.67 71.12,18.67 66.8,14.35 JP6.4
  Bottom 0.406: JP6.4 70.61,17.78 76.96,17.78 82.04,12.7 BODY2.1
BODY3
  Top 0.406: X4.6 8.34,52.03 8,51.69 7.62,51.69 3.3,47.37 JP8.4
  Bottom 0.406: JP8.4 7.11,50.8 13.46,50.8 18.54,45.72 BODY3.1
BODY4
  Top 0.406: X5.6 40.09,52.03 39.75,51.69 39.37,51.69 35.05,47.37 JP10.4
  Bottom 0.406: JP10.4 38.86,50.8 45.21,50.8 50.29,45.72 BODY4.1
BODY5
  Top 0.406: X6.6 71.84,52.03 71.5,51.69 71.12,51.69 66.8,47.37 JP12.4
  Bottom 0.406: JP12.4 70.61,50.8 76.96,50.8 82.04,45.72 BODY5.1
BODY6
  Top 0.406: X7.6 8.34,85.05 8,84.71 7.62,84.71 3.3,80.39 JP14.4
  Bottom 0.406: JP14.4 7.11,83.82 13.46,83.82 18.54,78.74 BODY6.1
BODY7
  Top 0.406: X8.6 40.09,85.05 39.75,84.71 39.37,84.71 35.05,80.39 JP16.4
  Bottom 0.406: JP16.4 38.86,83.82 45.21,83.82 50.29,78.74 BODY7.1
BODY8
  Top 0.406: X9.6 71.84,85.05 71.5,84.71 71.12,84.71 66.8,80.39 JP18.4
  Bottom 0.406: JP18.4 70.61,83.82 76.96,83.82 82.04,78.74 BODY8.1
CH_PD
  Top 0.406: JP3.7 4.06,21.59 7.48,25.01 X1.3 8.75,24.89 10.41,24.89 11.18,24.13 11.18,14.48 10.16,13.46 R1.2
CH_PD1
  Top 0.406: JP4.7 35.81,21.59 39.23,25.01 X2.3 40.5,24.89 42.16,24.89 42.93,24.13 42.93,14.48 41.91,13.46 R6.2
CH_PD2
  Top 0.406: JP6.7 67.56,21.59 70.98,25.01 X3.3 72.25,24.89 73.91,24.89 74.68,24.13 74.68,14.48 73.66,13.46 R10.2
CH_PD3
  Top 0.406: JP8.7 4.06,54.61 7.48,58.03 X4.3 8.75,57.91 10.41,57.91 11.18,57.15 11.18,47.5 10.16,46.48 R14.2
CH_PD4
  Top 0.406: JP10.7 35.81,54.61 39.23,58.03 X5.3 40.5,57.91 42.16,57.91 42.93,57.15 42.93,47.5 41.91,46.48 R18.2
CH_PD5
  Top 0.406: JP12.7 67.56,54.61 70.98,58.03 X6.3 72.25,57.91 73.91,57.91 74.68,57.15 74.68,47.5 73.66,46.48 R22.2
CH_PD6
  Top 0.406: JP14.7 4.06,87.63 7.48,91.05 X7.3 8.75,90.93 10.41,90.93 11.18,90.17 11.18,80.52 10.16,79.5 R26.2
CH_PD7
  Top 0.406: JP16.7 35.81,87.63 39.23,91.05 X8.3 40.5,90.93 42.16,90.93 42.93,90.17 42.93,80.52 41.91,79.5 R30.2
CH_PD8
  Top 0.406: JP18.7 67.56,87.63 70.98,91.05 X9.3 72.25,90.93 73.91,90.93 74.68,90.17 74.68,80.52 73.66,79.5 R34.2
CLAW
  Top 0.406: X1.4 8.03,23.01 4.06,19.05 JP3.6
  Bottom 0.406: JP3.6 4.83,20.57 15.24,20.57 24.89,10.92 CLAW.1
CLAW1
  Top 0.406: X2.4 39.77,23.01 35.81,19.05 JP4.6
  Bottom 0.406: JP4.6 36.58,20.57 46.99,20.57 56.64,10.92 CLAW1.1
CLAW2
  Top 0.406: X3.4 71.53,23.01 67.56,19.05 JP6.6
  Bottom 0.406: JP6.6 68.33,20.57 78.74,20.57 88.39,10.92 CLAW2.1
CLAW3
  Top 0.406: X4.4 8.03,56.03 4.06,52.07 JP8.6
  Bottom 0.406: JP8.6 4.83,53.59 15.24,53.59 24.89,43.94 CLAW3.1
CLAW4
  Top 0.406: X5.4 39.77,56.03 35.81,52.07 JP10.6
  Bottom 0.406: JP10.6 36.58,53.59 46.99,53.59 56.64,43.94 CLAW4.1
CLAW5
  Top 0.406: X6.4 71.53,56.03 67.56,52.07 JP12.6
  Bottom 0.406: JP12.6 68.33,53.59 78.74,53.59 88.39,43.94 CLAW5.1
CLAW6
  Top 0.406: X7.4 8.03,89.05 4.06,85.09 JP14.6
  Bottom 0.406: JP14.6 4.83,86.61 15.24,86.61 24.89,76.96 CLAW6.1
CLAW7
  Top 0.406: X8.4 39.77,89.05 35.81,85.09 JP16.6
  Bottom 0.406: JP16.6 36.58,86.61 46.99,86.61 56.64,76.96 CLAW7.1
CLAW8
  Top 0.406: X9.4 71.53,89.05 67.56,85.09 JP18.6
  Bottom 0.406: JP18.6 68.33,86.61 78.74,86.61 88.39,76.96 CLAW8.1
DTR
  Top 0.406: R3.1 19.69,18.67 21.84,20.83 23.45,20.83 X1.12 24.2,21.01 JP2.4
DTR1
  Top 0.406: R8.1 51.43,18.67 53.59,20.83 55.2,20.83 X2.12 55.95,21.01 JP1.4
DTR2
  Top 0.406: R12.1 83.19,18.67 85.34,20.83 86.95,20.83 X3.12 87.7,21.01 JP5.4
DTR3
  Top 0.406: R16.1 19.69,51.69 21.84,53.85 23.45,53.85 X4.12 24.2,54.03 JP7.4
DTR4
  Top 0.406: R20.1 51.43,51.69 53.59,53.85 55.2,53.85 X5.12 55.95,54.03 JP9.4
DTR5
  Top 0.406: R24.1 83.19,51.69 85.34,53.85 86.95,53.85 X6.12 87.7,54.03 JP11.4
DTR6
  Top 0.406: R28.1 19.69,84.71 21.84,86.87 23.45,86.87 X7.12 24.2,87.05 JP13.4
DTR7
  Top 0.406: R32.1 51.43,84.71 53.59,86.87 55.2,86.87 X8.12 55.95,87.05 JP15.4
DTR8
  Top 0.406: R36.1 83.19,84.71 85.34,86.87 86.95,86.87 X9.12 87.7,87.05 JP17.4
GND
  Bottom 0.61: VREG1.1 11.7,7.89 10.41,6.6 8.64,6.6 8.38,6.35 8.38,3.49 C1.2
  pour Top: 1.27,31.75 1.27,1.27 30.48,1.27 30.48,31.75
  pour Bottom: 1.27,31.75 1.27,1.27 30.48,1.27 30.48,31.75
GND1
  Bottom 0.61: VREG2.1 43.45,7.89 42.16,6.6 40.39,6.6 40.13,6.35 40.13,3.49 C3.2
  pour Top: 33.02,31.75 33.02,1.27 62.23,1.27 62.23,31.75
  pour Bottom: 33.02,31.75 33.02,1.27 62.23,1.27 62.23,31.75
GND2
  Bottom 0.61: VREG3.1 75.2,7.89 73.91,6.6 72.14,6.6 71.88,6.35 71.88,3.49 C5.2
  pour Top: 64.77,31.75 64.77,1.27 93.98,1.27 93.98,31.75
  pour Bottom: 64.77,31.75 64.77,1.27 93.98,1.27 93.98,31.75
GND3
  Bottom 0.61: VREG4.1 11.7,40.91 10.41,39.62 8.64,39.62 8.38,39.37 8.38,36.51 C7.2
  pour Top: 1.27,64.77 1.27,34.29 30.48,34.29 30.48,64.77
  pour Bottom: 1.27,64.77 1.27,34.29 30.48,34.29 30.48,64.77
GND4
  Bottom 0.61: VREG5.1 43.45,40.91 42.16,39.62 40.39,39.62 40.13,39.37 40.13,36.51 C9.2
  pour Top: 33.02,64.77 33.02,34.29 62.23,34.29 62.23,64.77
  pour Bottom: 33.02,64.77 33.02,34.29 62.23,34.29 62.23,64.77
GND5
  Bottom 0.61: VREG6.1 75.2,40.91 73.91,39.62 72.14,39.62 71.88,39.37 71.88,36.51 C11.2
  pour Top: 64.77,64.77 64.77,34.29 93.98,34.29 93.98,64.77
  pour Bottom: 64.77,64.77 64.77,34.29 93.98,34.29 93.98,64.77
GND6
  Bottom 0.61: VREG7.1 11.7,73.93 10.41,72.64 8.64,72.64 8.38,72.39 8.38,69.53 C13.2
  pour Top: 1.27,97.79 1.27,67.31 30.48,67.31 30.48,97.79
  pour Bottom: 1.27,97.79 1.27,67.31 30.48,67.31 30.48,97.79
GND7
  Bottom 0.61: VREG8.1 43.45,73.93 42.16,72.64 40.39,72.64 40.13,72.39 40.13,69.53 C15.2
  pour Top: 33.02,97.79 33.02,67.31 62.23,67.31 62.23,97.79
  pour Bottom: 33.02,97.79 33.02,67.31 62.23,67.31 62.23,97.79
GND8
  Bottom 0.61: VREG9.1 75.2,73.93 73.91,72.64 72.14,72.64 71.88,72.39 71.88,69.53 C17.2
  pour Top: 64.77,97.79 64.77,67.31 93.98,67.31 93.98,97.79
  pour Bottom: 64.77,97.79 64.77,67.31 93.98,67.31 93.98,97.79
GPIO1
  Top 0.406: X2.13 56.24,23.01 JP1.5
GPIO2
  Top 0.406: X1.11 24.17,19.01 27.18,16 27.18,15.24 JP2.3
GPIO3
  Top 0.406: X2.11 55.92,19.01 58.93,16 58.93,15.24 JP1.3
GPIO4
  Top 0.406: X1.14 25.28,25.01 JP2.6
GPIO5
  Top 0.406: X1.13 24.49,23.01 JP2.5
GPIO6
  Top 0.406: X2.14 57.03,25.01 JP1.6
GPIO7
  Top 0.406: R5.2 53.98,13.08 53.09,13.97 53.09,16.26 53.85,17.02 X2.10 56.13,17.02 56.13,16.76 57.66,15.24 57.66,13.21 59.44,11.43 JP1.2
GPIO8
  Top 0.406: X3.13 87.99,23.01 JP5.5
GPIO9
  Top 0.406: X3.11 87.67,19.01 90.68,16 90.68,15.24 JP5.3
GPIO10
  Top 0.406: X3.14 88.78,25.01 JP5.6
GPIO11
  Top 0.406: R9.2 85.73,13.08 84.84,13.97 84.84,16.26 85.6,17.02 X3.10 87.14,17.02 87.88,17.02 87.88,16.76 89.41,15.24 89.41,13.21 91.19,11.43 JP5.2
GPIO12
  Top 0.406: X4.13 24.49,56.03 JP7.5
GPIO13
  Top 0.406: X4.11 24.17,52.03 27.18,49.02 27.18,48.26 JP7.3
GPIO14
  Top 0.406: X4.14 25.28,58.03 JP7.6
GPIO15
  Top 0.406: R4.2 22.23,13.08 21.34,13.97 21.34,16.26 22.1,17.02 X1.10 23.64,17.02 24.38,17.02 24.38,16.76 25.91,15.24 25.91,13.21 27.69,11.43 JP2.2
GPIO16
  Top 0.406: R13.2 22.23,46.1 21.34,46.99 21.34,49.28 22.1,50.04 X4.10 23.64,50.04 24.38,50.04 24.38,49.78 25.91,48.26 25.91,46.23 27.69,44.45 JP7.2
GPIO17
  Top 0.406: X5.13 56.24,56.03 JP9.5
GPIO18
  Top 0.406: X5.11 55.92,52.03 58.93,49.02 58.93,48.26 JP9.3
GPIO19
  Top 0.406: X5.14 57.03,58.03 JP9.6
GPIO20
  Top 0.406: R17.2 53.98,46.1 53.09,46.99 53.09,49.28 53.85,50.04 X5.10 56.13,50.04 56.13,49.78 57.66,48.26 57.66,46.23 59.44,44.45 JP9.2
GPIO21
  Top 0.406: X6.13 87.99,56.03 JP11.5
GPIO22
  Top 0.406: X6.11 87.67,52.03 90.68,49.02 90.68,48.26 JP11.3
GPIO23
  Top 0.406: X6.14 88.78,58.03 JP11.6
GPIO24
  Top 0.406: R21.2 85.73,46.1 84.84,46.99 84.84,49.28 85.6,50.04 X6.10 87.14,50.04 87.88,50.04 87.88,49.78 89.41,48.26 89.41,46.23 91.19,44.45 JP11.2
GPIO25
  Top 0.406: X7.13 24.49,89.05 JP13.5
GPIO26
  Top 0.406: X7.11 24.17,85.05 27.18,82.04 27.18,81.28 JP13.3
GPIO27
  Top 0.406: X7.14 25.28,91.05 JP13.6
GPIO28
  Top 0.406: R25.2 22.23,79.12 21.34,80.01 21.34,82.3 22.1,83.06 X7.10 23.64,83.06 24.38,83.06 24.38,82.8 25.91,81.28 25.91,79.25 27.69,77.47 JP13.2
GPIO29
  Top 0.406: X8.13 56.24,89.05 JP15.5
GPIO30
  Top 0.406: X8.11 55.92,85.05 58.93,82.04 58.93,81.28 JP15.3
GPIO31
  Top 0.406: X8.14 57.03,91.05 JP15.6
GPIO32
  Top 0.406: R29.2 53.98,79.12 53.09,80.01 53.09,82.3 53.85,83.06 X8.10 56.13,83.06 56.13,82.8 57.66,81.28 57.66,79.25 59.44,77.47 JP15.2
GPIO33
  Top 0.406: X9.13 87.99,89.05 JP17.5
GPIO34
  Top 0.406: X9.11 87.67,85.05 90.68,82.04 90.68,81.28 JP17.3
GPIO35
  Top 0.406: X9.14 88.78,91.05 JP17.6
GPIO36
  Top 0.406: R33.2 85.73,79.12 84.84,80.01 84.84,82.3 85.6,83.06 X9.10 87.14,83.06 87.88,83.06 87.88,82.8 89.41,81.28 89.41,79.25 91.19,77.47 JP17.2
NECK
  Top 0.406: X1.5 8.31,21.01 3.81,16.51 JP3.5
  Bottom 0.406: JP3.5 5.84,19.3 14.22,19.3 21.72,11.81 NECK.1
NECK1
  Top 0.406: X2.5 40.06,21.01 35.56,16.51 JP4.5
  Bottom 0.406: JP4.5 37.59,19.3 45.97,19.3 53.47,11.81 NECK1.1
NECK2
  Top 0.406: X3.5 71.81,21.01 67.31,16.51 JP6.5
  Bottom 0.406: JP6.5 69.34,19.3 77.72,19.3 85.22,11.81 NECK2.1
NECK3
  Top 0.406: X4.5 8.31,54.03 3.81,49.53 JP8.5
  Bottom 0.406: JP8.5 5.84,52.32 14.22,52.32 21.72,44.83 NECK3.1
NECK4
  Top 0.406: X5.5 40.06,54.03 35.56,49.53 JP10.5
  Bottom 0.406: JP10.5 37.59,52.32 45.97,52.32 53.47,44.83 NECK4.1
NECK5
  Top 0.406: X6.5 71.81,54.03 67.31,49.53 JP12.5
  Bottom 0.406: JP12.5 69.34,52.32 77.72,52.32 85.22,44.83 NECK5.1
NECK6
  Top 0.406: X7.5 8.31,87.05 3.81,82.55 JP14.5
  Bottom 0.406: JP14.5 5.84,85.34 14.22,85.34 21.72,77.85 NECK6.1
NECK7
  Top 0.406: X8.5 40.06,87.05 35.56,82.55 JP16.5
  Bottom 0.406: JP16.5 37.59,85.34 45.97,85.34 53.47,77.85 NECK7.1
NECK8
  Top 0.406: X9.5 71.81,87.05 67.31,82.55 JP18.5
  Bottom 0.406: JP18.5 69.34,85.34 77.72,85.34 85.22,77.85 NECK8.1
RESET
  Top 0.406: JP3.9 3.3,26.92 4.83,26.92 6.91,29.01 X1.1 8.68,28.96 10.67,28.96 12.7,26.92 R2.2 12.77,12.45 13.46,12.45 14.22,11.68 14.22,9.91 13.21,8.89 8.58,8.89 RESET.2
RESET1
  Top 0.406: JP4.9 35.05,26.92 36.58,26.92 38.66,29.01 X2.1 40.43,28.96 42.42,28.96 44.45,26.92 R7.2 44.52,12.45 45.21,12.45 45.97,11.68 45.97,9.91 44.96,8.89 40.33,8.89 RESET1.2
RESET2
  Top 0.406: JP6.9 66.8,26.92 68.33,26.92 70.41,29.01 X3.1 72.18,28.96 74.17,28.96 76.2,26.92 R11.2 76.27,12.45 76.96,12.45 77.72,11.68 77.72,9.91 76.71,8.89 72.08,8.89 RESET2.2
RESET3
  Top 0.406: JP8.9 3.3,59.94 4.83,59.94 6.91,62.03 X4.1 8.68,61.98 10.67,61.98 12.7,59.94 R15.2 12.77,45.47 13.46,45.47 14.22,44.7 14.22,42.93 13.21,41.91 8.58,41.91 RESET3.2
RESET4
  Top 0.406: JP10.9 35.05,59.94 36.58,59.94 38.66,62.03 X5.1 40.43,61.98 42.42,61.98 44.45,59.94 R19.2 44.52,45.47 45.21,45.47 45.97,44.7 45.97,42.93 44.96,41.91 40.33,41.91 RESET4.2
RESET5
  Top 0.406: JP12.9 66.8,59.94 68.33,59.94 70.41,62.03 X6.1 72.18,61.98 74.17,61.98 76.2,59.94 R23.2 76.27,45.47 76.96,45.47 77.72,44.7 77.72,42.93 76.71,41.91 72.08,41.91 RESET5.2
RESET6
  Top 0.406: JP14.9 3.3,92.96 4.83,92.96 6.91,95.05 X7.1 8.68,95 10.67,95 12.7,92.96 R27.2 12.77,78.49 13.46,78.49 14.22,77.72 14.22,75.95 13.21,74.93 8.58,74.93 RESET6.2
RESET7
  Top 0.406: JP16.9 35.05,92.96 36.58,92.96 38.66,95.05 X8.1 40.43,95 42.42,95 44.45,92.96 R31.2 44.52,78.49 45.21,78.49 45.97,77.72 45.97,75.95 44.96,74.93 40.33,74.93 RESET7.2
RESET8
  Top 0.406: JP18.9 66.8,92.96 68.33,92.96 70.41,95.05 X9.1 72.18,95 74.17,95 76.2,92.96 R35.2 76.27,78.49 76.96,78.49 77.72,77.72 77.72,75.95 76.71,74.93 72.08,74.93 RESET8.2
RX
  Top 0.406: X1.15 25.57,27.01 JP2.7
RX1
  Top 0.406: X2.15 57.32,27.01 JP1.7
RX2
  Top 0.406: X3.15 89.07,27.01 JP5.7
RX3
  Top 0.406: X4.15 25.57,60.03 JP7.7
RX4
  Top 0.406: X5.15 57.32,60.03 JP9.7
RX5
  Top 0.406: X6.15 89.07,60.03 JP11.7
RX6
  Top 0.406: X7.15 25.57,93.05 JP13.7
RX7
  Top 0.406: X8.15 57.32,93.05 JP15.7
RX8
  Top 0.406: X9.15 89.07,93.05 JP17.7
TX
  Top 0.406: X1.16 25.35,29.01 27.69,26.67 JP2.8
TX1
  Top 0.406: X2.16 57.09,29.01 59.44,26.67 JP1.8
TX2
  Top 0.406: X3.16 88.84,29.01 91.19,26.67 JP5.8
TX3
  Top 0.406: X4.16 25.35,62.03 27.69,59.69 JP7.8
TX4
  Top 0.406: X5.16 57.09,62.03 59.44,59.69 JP9.8
TX5
  Top 0.406: X6.16 88.84,62.03 91.19,59.69 JP11.8
TX6
  Top 0.406: X7.16 25.35,95.05 27.69,92.71 JP13.8
TX7
  Top 0.406: X8.16 57.09,95.05 59.44,92.71 JP15.8
TX8
  Top 0.406: X9.16 88.84,95.05 91.19,92.71 JP17.8
VBATT  (via drill 0.6)
  Top 0.813: v5.08,7.62 5.08,7.11 6.86,5.33 11.89,5.33 POWER.1
  Bottom 0.406: 10.41,5.51 D1.A
  Bottom 0.813: CLAW.2 NECK.2 BODY.2 BASE.2 12.24,5.33 | JP3.1 3.81,6.35 v5.08,7.62
  Bottom 1.016: 12.24,5.33 12.19,5.33 | 12.19,5.33 10.49,5.33 D1.A | POWER.1 12.06,5.46 12.19,5.33
VBATT1  (via drill 0.6)
  Top 0.813: v36.83,7.62 36.83,7.11 38.61,5.33 43.64,5.33 POWER1.1
  Bottom 0.406: 42.16,5.51 D2.A
  Bottom 0.813: CLAW1.2 NECK1.2 BODY1.2 BASE1.2 43.99,5.33 | JP4.1 35.56,6.35 v36.83,7.62
  Bottom 1.016: 43.99,5.33 43.94,5.33 | 43.94,5.33 42.24,5.33 D2.A | POWER1.1 43.81,5.46 43.94,5.33
VBATT2  (via drill 0.6)
  Top 0.813: v68.58,7.62 68.58,7.11 70.36,5.33 75.39,5.33 POWER2.1
  Bottom 0.406: 73.91,5.51 D3.A
  Bottom 0.813: CLAW2.2 NECK2.2 BODY2.2 BASE2.2 75.74,5.33 | JP6.1 67.31,6.35 v68.58,7.62
  Bottom 1.016: 75.74,5.33 75.69,5.33 | 75.69,5.33 73.99,5.33 D3.A | POWER2.1 75.57,5.46 75.69,5.33
VBATT3  (via drill 0.6)
  Top 0.813: v5.08,40.64 5.08,40.13 6.86,38.35 11.89,38.35 POWER3.1
  Bottom 0.406: 10.41,38.53 D4.A
  Bottom 0.813: CLAW3.2 NECK3.2 BODY3.2 BASE3.2 12.24,38.35 | JP8.1 3.81,39.37 v5.08,40.64
  Bottom 1.016: 12.24,38.35 12.19,38.35 | 12.19,38.35 10.49,38.35 D4.A | POWER3.1 12.06,38.48 12.19,38.35
VBATT4  (via drill 0.6)
  Top 0.813: v36.83,40.64 36.83,40.13 38.61,38.35 43.64,38.35 POWER4.1
  Bottom 0.406: 42.16,38.53 D5.A
  Bottom 0.813: CLAW4.2 NECK4.2 BODY4.2 BASE4.2 43.99,38.35 | JP10.1 35.56,39.37 v36.83,40.64
  Bottom 1.016: 43.99,38.35 43.94,38.35 | 43.94,38.35 42.24,38.35 D5.A | POWER4.1 43.81,38.48 43.94,38.35
VBATT5  (via drill 0.6)
  Top 0.813: v68.58,40.64 68.58,40.13 70.36,38.35 75.39,38.35 POWER5.1
  Bottom 0.406: 73.91,38.53 D6.A
  Bottom 0.813: CLAW5.2 NECK5.2 BODY5.2 BASE5.2 75.74,38.35 | JP12.1 67.31,39.37 v68.58,40.64
  Bottom 1.016: 75.74,38.35 75.69,38.35 | 75.69,38.35 73.99,38.35 D6.A | POWER5.1 75.57,38.48 75.69,38.35
VBATT6  (via drill 0.6)
  Top 0.813: v5.08,73.66 5.08,73.15 6.86,71.37 11.89,71.37 POWER6.1
  Bottom 0.406: 10.41,71.55 D7.A
  Bottom 0.813: CLAW6.2 NECK6.2 BODY6.2 BASE6.2 12.24,71.37 | JP14.1 3.81,72.39 v5.08,73.66
  Bottom 1.016: 12.24,71.37 12.19,71.37 | 12.19,71.37 10.49,71.37 D7.A | POWER6.1 12.06,71.5 12.19,71.37
VBATT7  (via drill 0.6)
  Top 0.813: v36.83,73.66 36.83,73.15 38.61,71.37 43.64,71.37 POWER7.1
  Bottom 0.406: 42.16,71.55 D8.A
  Bottom 0.813: CLAW7.2 NECK7.2 BODY7.2 BASE7.2 43.99,71.37 | JP16.1 35.56,72.39 v36.83,73.66
  Bottom 1.016: 43.99,71.37 43.94,71.37 | 43.94,71.37 42.24,71.37 D8.A | POWER7.1 43.81,71.5 43.94,71.37
VBATT8  (via drill 0.6)
  Top 0.813: v68.58,73.66 68.58,73.15 70.36,71.37 75.39,71.37 POWER8.1
  Bottom 0.406: 73.91,71.55 D9.A
  Bottom 0.813: CLAW8.2 NECK8.2 BODY8.2 BASE8.2 75.74,71.37 | JP18.1 67.31,72.39 v68.58,73.66
  Bottom 1.016: 75.74,71.37 75.69,71.37 | 75.69,71.37 73.99,71.37 D9.A | POWER8.1 75.57,71.5 75.69,71.37
VIN
  Bottom 0.406: 6.86,5.33 D1.C 6.86,5.66 | 6.86,7.79 VREG1.3 | 6.53,3.57 C1.1
  Bottom 0.813: 6.86,7.79 6.86,5.66 | D1.C 6.53,3.57
VIN1
  Bottom 0.406: 38.61,5.33 D2.C 38.61,5.66 | 38.61,7.79 VREG2.3 | 38.28,3.57 C3.1
  Bottom 0.813: 38.61,7.79 38.61,5.66 | D2.C 38.28,3.57
VIN2
  Bottom 0.406: 70.36,5.33 D3.C 70.36,5.66 | 70.36,7.79 VREG3.3 | 70.03,3.57 C5.1
  Bottom 0.813: 70.36,7.79 70.36,5.66 | D3.C 70.03,3.57
VIN3
  Bottom 0.406: 6.86,38.35 D4.C 6.86,38.68 | 6.86,40.81 VREG4.3 | 6.53,36.59 C7.1
  Bottom 0.813: 6.86,40.81 6.86,38.68 | D4.C 6.53,36.59
VIN4
  Bottom 0.406: 38.61,38.35 D5.C 38.61,38.68 | 38.61,40.81 VREG5.3 | 38.28,36.59 C9.1
  Bottom 0.813: 38.61,40.81 38.61,38.68 | D5.C 38.28,36.59
VIN5
  Bottom 0.406: 70.36,38.35 D6.C 70.36,38.68 | 70.36,40.81 VREG6.3 | 70.03,36.59 C11.1
  Bottom 0.813: 70.36,40.81 70.36,38.68 | D6.C 70.03,36.59
VIN6
  Bottom 0.406: 6.86,71.37 D7.C 6.86,71.7 | 6.86,73.83 VREG7.3 | 6.53,69.61 C13.1
  Bottom 0.813: 6.86,73.83 6.86,71.7 | D7.C 6.53,69.61
VIN7
  Bottom 0.406: 38.61,71.37 D8.C 38.61,71.7 | 38.61,73.83 VREG8.3 | 38.28,69.61 C15.1
  Bottom 0.813: 38.61,73.83 38.61,71.7 | D8.C 38.28,69.61
VIN8
  Bottom 0.406: 70.36,71.37 D9.C 70.36,71.7 | 70.36,73.83 VREG9.3 | 70.03,69.61 C17.1
  Bottom 0.813: 70.36,73.83 70.36,71.7 | D9.C 70.03,69.61

## Text on the board
tPlace: TX | TX | TX | RST | RST | RST | RX | RX | RX | ADC | ADC | ADC | 5 | 5 | 5 | EN | EN | EN | 4 | 4 | 4 | 16 | 16 | 16 | 14 | 0 | 14 | 0 | 14 | 0 | 2 | 2 | 2 | 12 | 12 | 12 | 13 | R1 | R2 | 15 | 13 | R1 | R2 | 15 | 13 | R1 | R2 | 15 | BASE | BODY | R3 | NECK | R4 | CLAW | BASE | BODY | R3 | NECK | R4 | CLAW | BASE | BODY | R3 | NECK | R4 | CLAW | 3V3 | 3V3 | 3V3 | GND | GND | GND | + | PWR | + | PWR | + | PWR | VIN | VIN | VIN | RST | - | RST | - | RST | - | TX | TX | TX | RST | RST | RST | RX | RX | RX | ADC | ADC | ADC | EN | 5 | EN | 5 | EN | 5 | 4 | 4 | 4 | 16 | 16 | 16 | 14 | 0 | 14 | 0 | 14 | 0 | 2 | 2 | 2 | 12 | 12 | 12 | 13 | R1 | R2 | 15 | 13 | R1 | R2 | 15 | 13 | R1 | R2 | 15 | BASE | BODY | R3 | NECK | R4 | CLAW | BASE | BODY | R3 | NECK | R4 | CLAW | BASE | BODY | R3 | NECK | R4 | CLAW | 3V3 | 3V3 | 3V3 | GND | GND | GND | PWR | PWR | PWR | + | + | + | VIN | VIN | VIN | RST | - | RST | - | RST | - | TX | TX | TX | RST | RST | RST | RX | RX | RX | ADC | ADC | ADC | EN | 5 | EN | 5 | EN | 5 | 4 | 4 | 4 | 16 | 16 | 16 | 14 | 0 | 14 | 0 | 14 | 0 | 2 | 2 | 2 | 12 | 12 | 12 | 13 | R1 | R2 | 15 | 13 | R1 | R2 | 15 | 13 | R1 | R2 | 15 | BASE | BODY | R3 | NECK | R4 | CLAW | BASE | BODY | R3 | NECK | R4 | CLAW | BASE | BODY | R3 | NECK | R4 | CLAW | 3V3 | 3V3 | 3V3 | GND | GND | GND | PWR | PWR | PWR | + | + | + | VIN | VIN | VIN | RST | - | RST | - | RST | -
bPlace: eeArm | eeArm | eeArm | ESP Breakout | ESP Breakout | ESP Breakout | V1.0 | V1.0 | V1.0 | VREG1 | VREG1 | VREG1 | C2 | @TheGwa | C2 | @TheGwa | C2 | @TheGwa | D1 | D1 | D1 | C1 | C1 | C1 | eeArm | eeArm | eeArm | ESP Breakout | ESP Breakout | ESP Breakout | V1.0 | V1.0 | V1.0 | VREG1 | VREG1 | VREG1 | C2 | @TheGwa | C2 | @TheGwa | C2 | @TheGwa | D1 | D1 | D1 | C1 | C1 | C1 | eeArm | eeArm | eeArm | ESP Breakout | ESP Breakout | ESP Breakout | V1.0 | V1.0 | V1.0 | VREG1 | VREG1 | VREG1 | C2 | @TheGwa | C2 | @TheGwa | C2 | @TheGwa | D1 | D1 | D1 | C1 | C1 | C1